# Altium PCB 拨码开关.pcbdoc
Units mm, origin at the board's own origin, x right, y up, seen from the top; angles counter-clockwise.
Board outline 32.05 x 37.13 mm, 2 copper layers (Top Layer, Bottom Layer); 1 components, 0 nets, 4 pads, 0 vias.
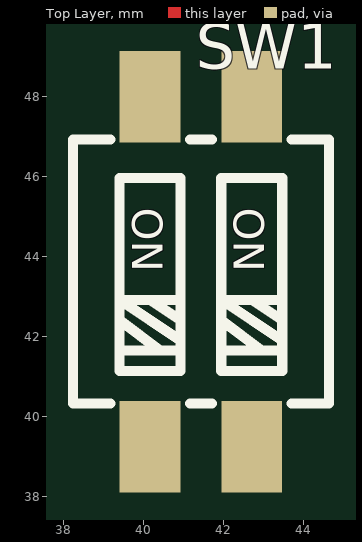
[diagram p0: Top Layer view]
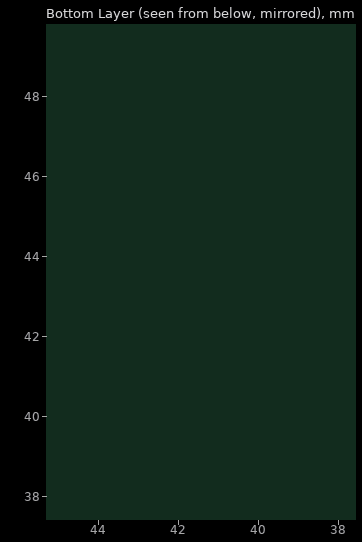
[diagram p1: Bottom Layer view, seen from below]

## Layer stack, top to bottom
Top Layer: signal copper (thickness not stored)
Dielectric: dielectric 0.32, FR-4, Dk 4.8
Bottom Layer: signal copper (thickness not stored)

## Board outline
57.454,25.4 25.4,25.4 25.4,62.535 57.454,62.535

## Components (designator, comment, footprint, x,y, rotation, side; value= is the part's Value field where it differs from the comment)
SW1 "SW-SMD_DM-02-V" SW-SMD_DM-02-V 41.427,43.618 r0 top

## Footprints (in the part's own frame and the unit in brackets; to place one, negate y for a bottom-side part, rotate by r counter-clockwise, add the part's x,y. Pads: shape width x height; smd on the part's side, far side on the other; paste and mask are expansions set on the pad)
SW-SMD_DM-02-V [mil]
  rect 60x90 smd: 1(-50,-172.24) 2(50,-172.24) 3(50,172.25) 4(-50,172.25)
  silkscreen extent -126,-130 126,130

## Nets (pads, with @x,y where several pads share a name; then routed paths per layer and width w, separated by ;. In a path a pad name is that pad's centre, name@x,y a point inside that pad or via, vN(x,y) a via of type N, cw(c..) or ccw(c..) an arc to the next point about the centre after c; other vN are vias at no path point)
pads on no net: SW1.1 SW1.2 SW1.3 SW1.4

## Silkscreen, mask and mechanical layers (free items; w line width, h text height)
Document:
  lines w0.003: 41.402,43.942 41.452,43.993

## Text inside footprints (layer, text, board x,y; h text height)
SW1: Top Overlay "ON" at 42.246,45.218 h0.76 r270; Top Overlay "ON" at 39.706,45.218 h0.76 r270